# EAGLE board CT_schematic (EAGLE 7.6.0)

Size 100 x 80 mm. Coordinates in mm from the lower left corner, seen from the top.
Outline: 0,0 100,0 100,80 0,80 0,0
Copper layers (1*16): Top 0.035mm / dielectric 1.5mm / Bottom 0.035mm
Design rules "default": minimum track width 10mil, minimum drill 24mil, track to track 8mil, track to pad 8mil, pad to pad 8mil, via to via 8mil, smd to smd 8mil, copper to edge 40mil, drill to drill 8mil, minimum pad ring 10mil, minimum via ring 8mil, stop-mask expansion 4mil, vias tented up to drill 0mil, thermal gap 10mil

## Footprints (pad centres in the part's own frame; a part is rotated, then mirrored left to right if it is on the bottom)
C0603 = smd 0.8 x 0.8: 1 -0.762,0; 2 0.762,0
C0402 = smd 0.5 x 0.5: 1 -0.508,0; 2 0.508,0
C0805 = smd 1.2 x 1.3: 1 -1.016,0; 2 1.016,0
2220 = smd 1.85 x 5.5: 1 -2.55,0; 2 2.55,0
C1210 = smd 1.2 x 2.5: 1 -1.524,0; 2 1.524,0
EXV-9H = smd 3.505 x 1.676: 1 -2.857,0; 2 2.857,0
L0603 = smd 0.8 x 0.8: 1 -0.762,0; 2 0.762,0
DR1040 = smd 1.6 x 3.2: 1 -4.458,0; 2 4.458,0
PJ-037B_PACKAGE = drill 3.7 square: 1 12,0 | drill 3.2 square: 2 6,0
R0603 = smd 0.8 x 0.8: 1 -0.762,0; 2 0.762,0
LQFP208 = smd 0.3 x 1.2: 1 -12.75,-14.4; 2 -12.25,-14.4; 3 -11.75,-14.4; 4 -11.25,-14.4; 5 -10.75,-14.4; 6 -10.25,-14.4; 7 -9.75,-14.4; 8 -9.25,-14.4; 9 -8.75,-14.4; 10 -8.25,-14.4; 11 -7.75,-14.4; 12 -7.25,-14.4; 13 -6.75,-14.4; 14 -6.25,-14.4; 15 -5.75,-14.4; 16 -5.25,-14.4; 17 -4.75,-14.4; 18 -4.25,-14.4; 19 -3.75,-14.4; 20 -3.25,-14.4; 21 -2.75,-14.4; 22 -2.25,-14.4; 23 -1.75,-14.4; 24 -1.25,-14.4; 25 -0.75,-14.4; 26 -0.25,-14.4; 27 0.25,-14.4; 28 0.75,-14.4; 29 1.25,-14.4; 30 1.75,-14.4; 31 2.25,-14.4; 32 2.75,-14.4; 33 3.25,-14.4; 34 3.75,-14.4; 35 4.25,-14.4; 36 4.75,-14.4; 37 5.25,-14.4; 38 5.75,-14.4; 39 6.25,-14.4; 40 6.75,-14.4; 41 7.25,-14.4; 42 7.75,-14.4; 43 8.25,-14.4; 44 8.75,-14.4; 45 9.25,-14.4; 46 9.75,-14.4; 47 10.25,-14.4; 48 10.75,-14.4; 49 11.25,-14.4; 50 11.75,-14.4; 51 12.25,-14.4; 52 12.75,-14.4; 105 12.75,14.4; 106 12.25,14.4; 107 11.75,14.4; 108 11.25,14.4; 109 10.75,14.4; 110 10.25,14.4; 111 9.75,14.4; 112 9.25,14.4; 113 8.75,14.4; 114 8.25,14.4; 115 7.75,14.4; 116 7.25,14.4; 117 6.75,14.4; 118 6.25,14.4; 119 5.75,14.4; 120 5.25,14.4; 121 4.75,14.4; 122 4.25,14.4; 123 3.75,14.4; 124 3.25,14.4; 125 2.75,14.4; 126 2.25,14.4; 127 1.75,14.4; 128 1.25,14.4; 129 0.75,14.4; 130 0.25,14.4; 131 -0.25,14.4; 132 -0.75,14.4; 133 -1.25,14.4; 134 -1.75,14.4; 135 -2.25,14.4; 136 -2.75,14.4; 137 -3.25,14.4; 138 -3.75,14.4; 139 -4.25,14.4; 140 -4.75,14.4; 141 -5.25,14.4; 142 -5.75,14.4; 143 -6.25,14.4; 144 -6.75,14.4; 145 -7.25,14.4; 146 -7.75,14.4; 147 -8.25,14.4; 148 -8.75,14.4; 149 -9.25,14.4; 150 -9.75,14.4; 151 -10.25,14.4; 152 -10.75,14.4; 153 -11.25,14.4; 154 -11.75,14.4; 155 -12.25,14.4; 156 -12.75,14.4 | smd 1.2 x 0.3: 53 14.4,-12.75; 54 14.4,-12.25; 55 14.4,-11.75; 56 14.4,-11.25; 57 14.4,-10.75; 58 14.4,-10.25; 59 14.4,-9.75; 60 14.4,-9.25; 61 14.4,-8.75; 62 14.4,-8.25; 63 14.4,-7.75; 64 14.4,-7.25; 65 14.4,-6.75; 66 14.4,-6.25; 67 14.4,-5.75; 68 14.4,-5.25; 69 14.4,-4.75; 70 14.4,-4.25; 71 14.4,-3.75; 72 14.4,-3.25; 73 14.4,-2.75; 74 14.4,-2.25; 75 14.4,-1.75; 76 14.4,-1.25; 77 14.4,-0.75; 78 14.4,-0.25; 79 14.4,0.25; 80 14.4,0.75; 81 14.4,1.25; 82 14.4,1.75; 83 14.4,2.25; 84 14.4,2.75; 85 14.4,3.25; 86 14.4,3.75; 87 14.4,4.25; 88 14.4,4.75; 89 14.4,5.25; 90 14.4,5.75; 91 14.4,6.25; 92 14.4,6.75; 93 14.4,7.25; 94 14.4,7.75; 95 14.4,8.25; 96 14.4,8.75; 97 14.4,9.25; 98 14.4,9.75; 99 14.4,10.25; 100 14.4,10.75; 101 14.4,11.25; 102 14.4,11.75; 103 14.4,12.25; 104 14.4,12.75; 157 -14.4,12.75; 158 -14.4,12.25; 159 -14.4,11.75; 160 -14.4,11.25; 161 -14.4,10.75; 162 -14.4,10.25; 163 -14.4,9.75; 164 -14.4,9.25; 165 -14.4,8.75; 166 -14.4,8.25; 167 -14.4,7.75; 168 -14.4,7.25; 169 -14.4,6.75; 170 -14.4,6.25; 171 -14.4,5.75; 172 -14.4,5.25; 173 -14.4,4.75; 174 -14.4,4.25; 175 -14.4,3.75; 176 -14.4,3.25; 177 -14.4,2.75; 178 -14.4,2.25; 179 -14.4,1.75; 180 -14.4,1.25; 181 -14.4,0.75; 182 -14.4,0.25; 183 -14.4,-0.25; 184 -14.4,-0.75; 185 -14.4,-1.25; 186 -14.4,-1.75; 187 -14.4,-2.25; 188 -14.4,-2.75; 189 -14.4,-3.25; 190 -14.4,-3.75; 191 -14.4,-4.25; 192 -14.4,-4.75; 193 -14.4,-5.25; 194 -14.4,-5.75; 195 -14.4,-6.25; 196 -14.4,-6.75; 197 -14.4,-7.25; 198 -14.4,-7.75; 199 -14.4,-8.25; 200 -14.4,-8.75; 201 -14.4,-9.25; 202 -14.4,-9.75; 203 -14.4,-10.25; 204 -14.4,-10.75; 205 -14.4,-11.25; 206 -14.4,-11.75; 207 -14.4,-12.25; 208 -14.4,-12.75
LBGA-64 = smd 0.559 x 0.559: A1 -3.5,3.5; A2 -2.5,3.5; A3 -1.5,3.5; A4 -0.5,3.5; A5 0.5,3.5; A6 1.5,3.5; A7 2.5,3.5; A8 3.5,3.5; B1 -3.5,2.5; B2 -2.5,2.5; B3 -1.5,2.5; B4 -0.5,2.5; B5 0.5,2.5; B6 1.5,2.5; B7 2.5,2.5; B8 3.5,2.5; C1 -3.5,1.5; C2 -2.5,1.5; C3 -1.5,1.5; C4 -0.5,1.5; C5 0.5,1.5; C6 1.5,1.5; C7 2.5,1.5; C8 3.5,1.5; D1 -3.5,0.5; D2 -2.5,0.5; D3 -1.5,0.5; D4 -0.5,0.5; D5 0.5,0.5; D6 1.5,0.5; D7 2.5,0.5; D8 3.5,0.5; E1 -3.5,-0.5; E2 -2.5,-0.5; E3 -1.5,-0.5; E4 -0.5,-0.5; E5 0.5,-0.5; E6 1.5,-0.5; E7 2.5,-0.5; E8 3.5,-0.5; F1 -3.5,-1.5; F2 -2.5,-1.5; F3 -1.5,-1.5; F4 -0.5,-1.5; F5 0.5,-1.5; F6 1.5,-1.5; F7 2.5,-1.5; F8 3.5,-1.5; G1 -3.5,-2.5; G2 -2.5,-2.5; G3 -1.5,-2.5; G4 -0.5,-2.5; G5 0.5,-2.5; G6 1.5,-2.5; G7 2.5,-2.5; G8 3.5,-2.5; H1 -3.5,-3.5; H2 -2.5,-3.5; H3 -1.5,-3.5; H4 -0.5,-3.5; H5 0.5,-3.5; H6 1.5,-3.5; H7 2.5,-3.5; H8 3.5,-3.5
TFBGA-153 = smd 0.3 x 0.3: A1 -3.25,3.25; A2 -2.75,3.25; A3 -2.25,3.25; A4 -1.75,3.25; A5 -1.25,3.25; A6 -0.75,3.25; A7 -0.25,3.25; A8 0.25,3.25; A9 0.75,3.25; A10 1.25,3.25; A11 1.75,3.25; A12 2.25,3.25; A13 2.75,3.25; A14 3.25,3.25; B1 -3.25,2.75; B2 -2.75,2.75; B3 -2.25,2.75; B4 -1.75,2.75; B5 -1.25,2.75; B6 -0.75,2.75; B7 -0.25,2.75; B8 0.25,2.75; B9 0.75,2.75; B10 1.25,2.75; B11 1.75,2.75; B12 2.25,2.75; B13 2.75,2.75; B14 3.25,2.75; C1 -3.25,2.25; C2 -2.75,2.25; C3 -2.25,2.25; C4 -1.75,2.25; C5 -1.25,2.25; C6 -0.75,2.25; C7 -0.25,2.25; C8 0.25,2.25; C9 0.75,2.25; C10 1.25,2.25; C11 1.75,2.25; C12 2.25,2.25; C13 2.75,2.25; C14 3.25,2.25; D1 -3.25,1.75; D2 -2.75,1.75; D3 -2.25,1.75; D4 -1.75,1.75; D12 2.25,1.75; D13 2.75,1.75; D14 3.25,1.75; E1 -3.25,1.25; E2 -2.75,1.25; E3 -2.25,1.25; E5 -1.25,1.25; E6 -0.75,1.25; E7 -0.25,1.25; E8 0.25,1.25; E9 0.75,1.25; E10 1.25,1.25; E12 2.25,1.25; E13 2.75,1.25; E14 3.25,1.25; F1 -3.25,0.75; F2 -2.75,0.75; F3 -2.25,0.75; F5 -1.25,0.75; F10 1.25,0.75; F12 2.25,0.75; F13 2.75,0.75; F14 3.25,0.75; G1 -3.25,0.25; G2 -2.75,0.25; G3 -2.25,0.25; G5 -1.25,0.25; G10 1.25,0.25; G12 2.25,0.25; G13 2.75,0.25; G14 3.25,0.25; H1 -3.25,-0.25; H2 -2.75,-0.25; H3 -2.25,-0.25; H5 -1.25,-0.25; H10 1.25,-0.25; H12 2.25,-0.25; H13 2.75,-0.25; H14 3.25,-0.25; J1 -3.25,-0.75; J2 -2.75,-0.75; J3 -2.25,-0.75; J5 -1.25,-0.75; J10 1.25,-0.75; J12 2.25,-0.75; J13 2.75,-0.75; J14 3.25,-0.75; K1 -3.25,-1.25; K2 -2.75,-1.25; K3 -2.25,-1.25; K5 -1.25,-1.25; K6 -0.75,-1.25; K7 -0.25,-1.25; K8 0.25,-1.25; K9 0.75,-1.25; K10 1.25,-1.25; K12 2.25,-1.25; K13 2.75,-1.25; K14 3.25,-1.25; L1 -3.25,-1.75; L2 -2.75,-1.75; L3 -2.25,-1.75; L12 2.25,-1.75; L13 2.75,-1.75; L14 3.25,-1.75; M1 -3.25,-2.25; M2 -2.75,-2.25; M3 -2.25,-2.25; M4 -1.75,-2.25; M5 -1.25,-2.25; M6 -0.75,-2.25; M7 -0.25,-2.25; M8 0.25,-2.25; M9 0.75,-2.25; M10 1.25,-2.25; M11 1.75,-2.25; M12 2.25,-2.25; M13 2.75,-2.25; M14 3.25,-2.25; N1 -3.25,-2.75; N2 -2.75,-2.75; N3 -2.25,-2.75; N4 -1.75,-2.75; N5 -1.25,-2.75; N6 -0.75,-2.75; N7 -0.25,-2.75; N8 0.25,-2.75; N9 0.75,-2.75; N10 1.25,-2.75; N11 1.75,-2.75; N12 2.25,-2.75; N13 2.75,-2.75; N14 3.25,-2.75; P1 -3.25,-3.25; P2 -2.75,-3.25; P3 -2.25,-3.25; P4 -1.75,-3.25; P5 -1.25,-3.25; P6 -0.75,-3.25; P7 -0.25,-3.25; P8 0.25,-3.25; P9 0.75,-3.25; P10 1.25,-3.25; P11 1.75,-3.25; P12 2.25,-3.25; P13 2.75,-3.25; P14 3.25,-3.25
QFN-32 = smd 0.6 x 0.3: 1 -2.3,1.75; 2 -2.3,1.25; 3 -2.3,0.75; 4 -2.3,0.25; 5 -2.3,-0.25; 6 -2.3,-0.75; 7 -2.3,-1.25; 8 -2.3,-1.75; 17 2.3,-1.75; 18 2.3,-1.25; 19 2.3,-0.75; 20 2.3,-0.25; 21 2.3,0.25; 22 2.3,0.75; 23 2.3,1.25; 24 2.3,1.75 | smd 0.3 x 0.6: 9 -1.75,-2.3; 10 -1.25,-2.3; 11 -0.75,-2.3; 12 -0.25,-2.3; 13 0.25,-2.3; 14 0.75,-2.3; 15 1.25,-2.3; 16 1.75,-2.3; 25 1.75,2.3; 26 1.25,2.3; 27 0.75,2.3; 28 0.25,2.3; 29 -0.25,2.3; 30 -0.75,2.3; 31 -1.25,2.3; 32 -1.75,2.3 | smd 3.2 x 3.2: EXP 0,0
SJ-43515TS-SMT-TR = smd 2.2 x 3: 1 0.6,-7.4; 4 3.4,-7.4 | smd 3 x 3: 2 12.8,-7.4; 5 17,-3 | smd 2 x 3: 3 5.3,0; 6 2.5,0 | drill 1.8: P$7 4.5,-3.69; P$8 11.54,-3.69
WM-64PC = drill 0.6 pad 1: 1 -1,0.95; 2 -1,-0.95
RHB32_3P45X3P45 = smd 0.85 x 0.28: 1 -2.475,1.75; 2 -2.475,1.25; 3 -2.475,0.75; 4 -2.475,0.25; 5 -2.475,-0.25; 6 -2.475,-0.75; 7 -2.475,-1.25; 8 -2.475,-1.75; 17 2.475,-1.75; 18 2.475,-1.25; 19 2.475,-0.75; 20 2.475,-0.25; 21 2.475,0.25; 22 2.475,0.75; 23 2.475,1.25; 24 2.475,1.75 | smd 0.28 x 0.85: 9 -1.75,-2.475; 10 -1.25,-2.475; 11 -0.75,-2.475; 12 -0.25,-2.475; 13 0.25,-2.475; 14 0.75,-2.475; 15 1.25,-2.475; 16 1.75,-2.475; 25 1.75,2.475; 26 1.25,2.475; 27 0.75,2.475; 28 0.25,2.475; 29 -0.25,2.475; 30 -0.75,2.475; 31 -1.25,2.475; 32 -1.75,2.475 | smd 3.45 x 3.45: 33 0,0
FCI_10118193-0001LF = smd 0.4 x 1.35: 1 -1.3,2.675; 2 -0.65,2.675; 3 0,2.675; 4 0.65,2.675; 5 1.3,2.675 | smd 1.6 x 1.4: 6 -3.2,2.45; 7 3.2,2.45 | smd 1.9 x 1.9: 8 -1.2,0; 9 1.2,0 | hole 0.5: -3.3,0; 3.3,0
SOT143B = smd 1 x 0.7: 1 -0.75,-1 | smd 0.6 x 0.7: 2 0.95,-1; 3 0.95,1; 4 -0.95,1
ASEK = smd 1.4 x 1: 1 -1.1,-0.8; 2 1.1,-0.8; 3 1.1,0.8; 4 -1.1,0.8
ASFL1 = smd 1.7 x 1.5: 1 -1.27,-1.1; 2 1.27,-1.1; 3 1.27,1.1; 4 -1.27,1.1
QFN-16_EP = smd 0.805 x 0.3: 1 -1.452,0.75; 2 -1.452,0.25; 3 -1.452,-0.25; 4 -1.452,-0.75; 9 1.452,-0.75; 10 1.452,-0.25; 11 1.452,0.25; 12 1.452,0.75 | smd 0.3 x 0.805: 5 -0.75,-1.452; 6 -0.25,-1.452; 7 0.25,-1.452; 8 0.75,-1.452; 13 0.75,1.452; 14 0.25,1.452; 15 -0.25,1.452; 16 -0.75,1.452 | smd 1.55 x 1.55: 17 0,0
WSON-8 = smd 0.3 x 0.6: 1 -0.75,0; 2 0.05,0; 3 0.85,0; 4 1.65,0; 5 1.65,3.8; 6 0.85,3.8; 7 0.05,3.8; 8 -0.75,3.8 | smd 3 x 2.6: PAD 0.45,1.9
SON-6 = smd 0.55 x 0.3: 1 -0.355,0.5 | smd 0.52 x 0.3: 2 -0.37,0; 3 -0.37,-0.5; 4 0.37,-0.5; 5 0.37,0; 6 0.37,0.5
SW_4-1437565-2 = smd 1.4 x 2.1: 1 -2.23,4.55; 2 -2.23,-4.55; 3 2.23,4.55; 4 2.23,-4.55
LGM67K-G1J2-24-Z = smd 0.8 x 1.4: A -2,0; C 0,0
NC7SZ125M5X = smd 1.3 x 0.7: 1 -1.3,0.95; 2 -1.3,0; 3 -1.3,-0.95; 4 1.3,-0.95; 5 1.3,0.95

## Placement (x,y rotation side)
C1  1e-06  [C0603]  -49.53,88.9 0 top  (outside the outline)
C2  1e-07  [C0603]  -53.34,88.9 0 top  (outside the outline)
C3  1e-07  [C0603]  -57.15,88.9 0 top  (outside the outline)
C4  1e-07  [C0603]  -60.96,88.9 0 top  (outside the outline)
C5  1e-07  [C0603]  -64.77,88.9 0 top  (outside the outline)
C6  1e-07  [C0603]  -68.58,88.9 0 top  (outside the outline)
C7  1e-07  [C0603]  -72.39,88.9 0 top  (outside the outline)
C8  1e-07  [C0603]  -76.2,88.9 0 top  (outside the outline)
C9  1e-07  [C0603]  -80.01,88.9 0 top  (outside the outline)
C10  1e-07  [C0603]  -83.82,88.9 0 top  (outside the outline)
C11  1e-07  [C0603]  -87.63,88.9 0 top  (outside the outline)
C12  1e-07  [C0603]  -91.44,88.9 0 top  (outside the outline)
C13  1e-07  [C0603]  -15.24,93.98 0 top  (outside the outline)
C14  1e-07  [C0603]  -19.05,93.98 0 top  (outside the outline)
C15  1e-07  [C0603]  -22.86,93.98 0 top  (outside the outline)
C16  1e-07  [C0603]  -26.67,93.98 0 top  (outside the outline)
C17  1e-07  [C0603]  -30.48,93.98 0 top  (outside the outline)
C18  1e-07  [C0603]  -34.29,93.98 0 top  (outside the outline)
C19  1e-07  [C0603]  -38.1,93.98 0 top  (outside the outline)
C20  4.7e-06  [C0603]  -19.05,88.9 0 top  (outside the outline)
C21  1e-07  [C0603]  -41.91,93.98 0 top  (outside the outline)
C22  2.2e-06  [C0603]  -22.86,88.9 0 top  (outside the outline)
C23  2.2e-06  [C0603]  -26.67,88.9 0 top  (outside the outline)
C24  1e-08  [C0603]  -45.72,93.98 0 top  (outside the outline)
C25  1e-06  [C0603]  -49.53,93.98 0 top  (outside the outline)
C26  1e-07  [C0603]  -53.34,93.98 0 top  (outside the outline)
C27  1e-08  [C0402]  -57.15,99.06 0 top  (outside the outline)
C28  1e-08  [C0402]  -60.96,99.06 0 top  (outside the outline)
C29  1e-07  [C0402]  -64.77,99.06 0 top  (outside the outline)
C30  2.2e-06  [C0603]  -30.48,88.9 0 top  (outside the outline)
C31  2.2e-06  [C0603]  -34.29,88.9 0 top  (outside the outline)
C32  1e-07  [C0402]  -68.58,99.06 0 top  (outside the outline)
C33  1e-07  [C0402]  -72.39,99.06 0 top  (outside the outline)
C34  2.2e-06  [C0603]  -38.1,88.9 0 top  (outside the outline)
C35  1e-06  [C0603]  -57.15,93.98 0 top  (outside the outline)
C36  1e-06  [C0603]  -60.96,93.98 0 top  (outside the outline)
C37  1e-06  [C0603]  -64.77,93.98 0 top  (outside the outline)
C38  1e-06  [C0603]  -68.58,93.98 0 top  (outside the outline)
C39  1e-06  [C0603]  -72.39,93.98 0 top  (outside the outline)
C40  1e-06  [C0603]  -76.2,93.98 0 top  (outside the outline)
C41  1e-06  [C0603]  -80.01,93.98 0 top  (outside the outline)
C42  1e-07  [C0402]  -76.2,99.06 0 top  (outside the outline)
C43  1e-07  [C0402]  -80.01,99.06 0 top  (outside the outline)
C44  1e-07  [C0402]  -83.82,99.06 0 top  (outside the outline)
C45  1e-07  [C0402]  -87.63,99.06 0 top  (outside the outline)
C46  1e-06  [C0603]  -83.82,93.98 0 top  (outside the outline)
C47  1e-07  [C0402]  -91.44,99.06 0 top  (outside the outline)
C48  2.2e-06  [C0603]  -41.91,88.9 0 top  (outside the outline)
C49  1e-07  [C0402]  -95.25,99.06 0 top  (outside the outline)
C50  1e-07  [C0402]  -15.24,104.14 0 top  (outside the outline)
C51  2.2e-06  [C0603]  -45.72,88.9 0 top  (outside the outline)
C52  1e-06  [C0603]  -87.63,93.98 0 top  (outside the outline)
C53  1e-08  [C0402]  -19.05,104.14 0 top  (outside the outline)
C54  1e-08  [C0402]  -22.86,104.14 0 top  (outside the outline)
C55  1e-08  [C0402]  -26.67,104.14 0 top  (outside the outline)
C56  1e-08  [C0402]  -30.48,104.14 0 top  (outside the outline)
C57  1e-05  [C0805]  -27.94,77.47 0 top  (outside the outline)
C58  1e-06  [C0603]  -91.44,93.98 0 top  (outside the outline)
C59  1e-07  [C0402]  -34.29,104.14 0 top  (outside the outline)
C60  6.8e-05  [2220]  -90.17,49.53 0 top  (outside the outline)
C61  1e-06  [C0603]  -15.24,99.06 0 top  (outside the outline)
C62  1e-05  [C1210]  -80.01,71.12 0 top  (outside the outline)
C63  1e-07  [C0402]  -38.1,104.14 0 top  (outside the outline)
C64  0.0001  [EXV-9H]  -38.1,71.12 0 top  (outside the outline)
C65  0.0001  [EXV-9H]  -49.53,71.12 0 top  (outside the outline)
C66  1e-08  [C0402]  -41.91,104.14 0 top  (outside the outline)
C67  1e-08  [C0402]  -45.72,104.14 0 top  (outside the outline)
C68  1e-08  [C0402]  -49.53,104.14 0 top  (outside the outline)
C69  1e-08  [C0402]  -53.34,104.14 0 top  (outside the outline)
F1  240.0  [L0603]  -19.05,99.06 0 top  (outside the outline)
I1  3.8e-06  [DR1040]  -54.61,49.53 0 top  (outside the outline)
J1  PJ-037B  [PJ-037B_PACKAGE]  -27.94,50.8 0 top  (outside the outline)
R2  1000.0  [R0603]  -22.86,99.06 0 top  (outside the outline)
R4  4700.0  [R0603]  -26.67,99.06 0 top  (outside the outline)
R5  4700.0  [R0603]  -30.48,99.06 0 top  (outside the outline)
R6  4700.0  [R0603]  -34.29,99.06 0 top  (outside the outline)
R7  4700.0  [R0603]  -38.1,99.06 0 top  (outside the outline)
R8  10000.0  [R0603]  -63.5,77.47 0 top  (outside the outline)
R9  10000.0  [R0603]  -68.58,77.47 0 top  (outside the outline)
R10  10000.0  [R0603]  -73.66,77.47 0 top  (outside the outline)
R11  10000.0  [R0603]  -78.74,77.47 0 top  (outside the outline)
R12  10000.0  [R0603]  -83.82,77.47 0 top  (outside the outline)
R13  10000.0  [R0603]  -88.9,77.47 0 top  (outside the outline)
R14  10000.0  [R0603]  -93.98,77.47 0 top  (outside the outline)
R15  34000.0  [R0603]  -15.24,83.82 0 top  (outside the outline)
R16  34000.0  [R0603]  -20.32,83.82 0 top  (outside the outline)
R17  34000.0  [R0603]  -25.4,83.82 0 top  (outside the outline)
R18  34000.0  [R0603]  -30.48,83.82 0 top  (outside the outline)
R19  34000.0  [R0603]  -35.56,83.82 0 top  (outside the outline)
R20  34000.0  [R0603]  -40.64,83.82 0 top  (outside the outline)
R21  34000.0  [R0603]  -45.72,83.82 0 top  (outside the outline)
R22  34000.0  [R0603]  -50.8,83.82 0 top  (outside the outline)
R23  34000.0  [R0603]  -55.88,83.82 0 top  (outside the outline)
R24  34000.0  [R0603]  -60.96,83.82 0 top  (outside the outline)
R25  1270.0  [R0603]  -41.91,99.06 0 top  (outside the outline)
R26  1270.0  [R0603]  -45.72,99.06 0 top  (outside the outline)
R27  10000.0  [R0603]  -66.04,83.82 0 top  (outside the outline)
R28  10000.0  [R0603]  -71.12,83.82 0 top  (outside the outline)
R29  20000.0  [R0603]  -76.2,83.82 0 top  (outside the outline)
R30  39000.0  [R0603]  -81.28,83.82 0 top  (outside the outline)
R31  300000.0  [R0603]  -38.1,77.47 0 top  (outside the outline)
R32  100000.0  [R0603]  -43.18,77.47 0 top  (outside the outline)
R33  153694.38  [R0603]  -33.02,77.47 0 top  (outside the outline)
R34  100000.0  [R0603]  -48.26,77.47 0 top  (outside the outline)
R35  10000.0  [R0603]  -86.36,83.82 0 top  (outside the outline)
R36  10000.0  [R0603]  -91.44,83.82 0 top  (outside the outline)
R37  82000.0  [R0603]  -15.24,88.9 0 top  (outside the outline)
R38  300000.0  [R0603]  -53.34,77.47 0 top  (outside the outline)
R39  120000.0  [R0603]  -58.42,77.47 0 top  (outside the outline)
U1  STM32F769BIT6  [LQFP208]  -27.94,15.24 0 top  (outside the outline)
U2  mt28ew256aba1HPC-0SIT  [LBGA-64]  -63.5,7.62 0 top  (outside the outline)
U3  mtfc4gmcdm  [TFBGA-153]  -50.8,8.89 0 top  (outside the outline)
U4  SGTL5000XNAA3  [QFN-32]  -81.28,49.53 0 top  (outside the outline)
U5  SJ-43515TS-SMT-TR  [SJ-43515TS-SMT-TR]  -39.37,39.37 0 top  (outside the outline)
U6  SJ-43515TS-SMT-TR  [SJ-43515TS-SMT-TR]  -67.31,39.37 0 top  (outside the outline)
U7  SJ-43515TS-SMT-TR  [SJ-43515TS-SMT-TR]  -95.25,39.37 0 top  (outside the outline)
U8  WM-64PCT  [WM-64PC]  -67.31,49.53 0 top  (outside the outline)
U9  TUSB1210BRHBR  [RHB32_3P45X3P45]  -59.69,71.12 0 top  (outside the outline)
U10  10118193-0001LF  [FCI_10118193-0001LF]  -88.9,60.96 0 top  (outside the outline)
U11  prtr5v0u2ax  [SOT143B]  -66.04,104.14 0 top  (outside the outline)
U12  ASEK-32.768KHz-ECST  [ASEK]  -29.21,71.12 0 top  (outside the outline)
U13  ASFL-24.57MHZ-NCS  [ASFL1]  -46.99,62.23 0 top  (outside the outline)
U14  ASFL1-25MHZ-NCS  [ASFL1]  -63.5,62.23 0 top  (outside the outline)
U15  ASFL1-26MHZ-NCS  [ASFL1]  -80.01,62.23 0 top  (outside the outline)
U16  LTC3601EUD#PBF  [QFN-16_EP]  -50.8,99.06 0 top  (outside the outline)
U17  LP2951ACSDX/NOPB  [WSON-8]  -29.21,60.96 0 top  (outside the outline)
U18  TPS3895ADRYR  [SON-6]  -69.85,102.87 0 top  (outside the outline)
U19  4-1437565-2  [SW_4-1437565-2]  -44.45,50.8 0 top  (outside the outline)
U20  Q65110A2395  [LGM67K-G1J2-24-Z]  -68.58,71.12 0 top  (outside the outline)
U21  nc7sz125m5x  [NC7SZ125M5X]  -85.09,69.85 0 top  (outside the outline)
U22  nc7sz125m5x  [NC7SZ125M5X]  -91.44,69.85 0 top  (outside the outline)
U23  nc7sz125m5x  [NC7SZ125M5X]  -15.24,77.47 0 top  (outside the outline)
U24  nc7sz125m5x  [NC7SZ125M5X]  -21.59,77.47 0 top  (outside the outline)

## Library data of the parts
C1-C69 F1 I1 J1 R2 R4-R39 U1-U24 = circuit_tree

## Nets
CLK_U1_9: U1.9 U12.3
CLK_U1_32: U1.32 U14.3
CLK_U4_21: U4.21 U13.3
CLK_U9_1: U9.1 U15.3
GND: C1.2 C2.2 C3.2 C4.2 C5.2 C6.2 C7.2 C8.2 C9.2 C10.2 C11.2 C12.2 C13.2 C14.2 C15.2 C16.2 C17.2 C18.2 C19.2 C20.2 C21.2 C22.2 C23.2 C24.2 C25.2 C26.2 C27.2 C28.2 C29.2 C30.2 C31.2 C32.2 C33.2 C34.2 C42.2 C43.2 C44.2 C45.2 C46.2 C47.2 C48.2 C49.2 C50.2 C51.2 C52.2 C53.2 C54.2 C55.2 C56.2 C57.2 C58.2 C60.1 C60.2 C61.2 C62.2 C63.2 C64.2 C65.2 C66.2 C67.2 C68.2 C69.2 J1.2 R2.2 R8.2 R26.2 R29.2 R31.2 R34.2 R37.2 R39.2 U1.14 U1.25 U1.40 U1.51 U1.60 U1.72 U1.82 U1.93 U1.114 U1.122 U1.128 U1.136 U1.149 U1.170 U1.184 U1.202 U2.E8 U2.H2 U2.H7 U3.C4 U3.E7 U3.G5 U3.H10 U3.K8 U3.N2 U3.N5 U3.P4 U3.P6 U4.1 U4.3 U4.7 U4.EXP U6.1 U7.1 U8.2 U9.33 U10.5 U10.6 U10.7 U10.8 U10.9 U11.1 U12.2 U13.2 U14.2 U15.2 U16.1 U16.9 U16.17 U17.3 U17.4 U17.PAD U18.2 U20.C U21.1 U21.3 U22.1 U22.3 U23.1 U23.3 U24.1 U24.3
NET_U1_34: R6.1 U1.34 U23.4
NET_U1_42: C24.1 C25.1 F1.1 U1.41 U1.42
NET_U1_92: C22.1 U1.92
NET_U1_119: U1.119
NET_U1_125: U1.125
NET_U1_148: C23.1 U1.148
NET_U1_197: R8.1 U1.197
NET_U1_203: R9.1 U1.203
NET_U1_207: U20.A
NET_U1_208: U19.3 U19.4
NET_U2_B4: R13.1 U2.B4
NET_U2_B5: R4.1 U2.B5 U21.4
NET_U3_C2: C31.1 C32.1 U3.C2
NET_U3_K5: R5.1 U3.K5 U22.4
NET_U4_10: C45.1 U4.10
NET_U4_29: R25.1 U4.29
NET_U4_31: R26.1 U4.31
NET_U5_1: U4.4 U5.1
NET_U5_2: U4.2 U5.2
NET_U5_5: U4.6 U5.5
NET_U6_2: C36.1 U6.2
NET_U6_5: C35.1 U6.5
NET_U6_11: C36.2
NET_U6_12: C35.2
NET_U7_2: C38.1 C39.1 U7.2
NET_U7_5: C37.1 U7.5
NET_U7_13: C38.2 C39.2
NET_U7_14: C37.2
NET_U8_1: C40.1 C41.1 C46.1 U4.16 U8.1
NET_U8_15: C40.2 C41.2
NET_U9_11: R27.1 U9.11
NET_U9_12: C51.1 U9.12
NET_U9_14: R28.1 U9.14
NET_U9_20: C48.1 U9.20
NET_U9_27: R7.1 U9.27 U24.4
NET_U10_1: C52.1 U9.22 U10.1 U11.4
NET_U10_2: U9.19 U10.2 U11.3
NET_U10_3: U9.18 U10.3 U11.2
NET_U16_3: C59.2 I1.1 U16.3 U16.4
NET_U16_6: C59.1 U16.6
NET_U16_7: C58.1 U16.7 U16.12
NET_U16_10: R31.1 U16.10
NET_U16_11: R29.1 R30.1 U16.11
NET_U16_14: U16.14
NET_U16_ATNET_3: I1.2 R30.2
NET_U17_5: R32.1 U17.5
NET_U17_7: R33.2 R34.1 U17.7
NET_U18_1: R36.1 R37.1 U18.1
NET_U18_3: R38.2 R39.1 U18.3
NET_U18_4: R35.1 U18.4 U21.2 U22.2 U23.2 U24.2
NET_U19_1: R2.1 U19.1 U19.2
PROC_FMC_A0: U1.16 U2.E2
PROC_FMC_A1: U1.17 U2.D2
PROC_FMC_A2: U1.18 U2.C2
PROC_FMC_A3: U1.22 U2.A2
PROC_FMC_A4: U1.23 U2.B2
PROC_FMC_A5: U1.24 U2.D3
PROC_FMC_A6: U1.71 U2.C3
PROC_FMC_A7: U1.74 U2.A3
PROC_FMC_A8: U1.75 U2.B6
PROC_FMC_A9: U1.76 U2.A6
PROC_FMC_A10: U1.77 U2.C6
PROC_FMC_A11: U1.78 U2.D6
PROC_FMC_A12: U1.129 U2.B7
PROC_FMC_A13: U1.130 U2.A7
PROC_FMC_A14: U1.131 U2.C7
PROC_FMC_A15: U1.132 U2.D7
PROC_FMC_A16: U1.111 U2.E7
PROC_FMC_A17: U1.112 U2.B3
PROC_FMC_A18: U1.113 U2.C4
PROC_FMC_A19: U1.2 U2.D5
PROC_FMC_A20: U1.3 U2.D4
PROC_FMC_A21: U1.4 U2.C5
PROC_FMC_A22: U1.5 U2.B8
PROC_FMC_A23: U1.1 U2.C8
PROC_FMC_D0: U1.116 U2.E3
PROC_FMC_D1: U1.117 U2.H3
PROC_FMC_D2: U1.164 U2.E4
PROC_FMC_D3: U1.165 U2.H4
PROC_FMC_D4: U1.79 U2.H5
PROC_FMC_D5: U1.80 U2.E5
PROC_FMC_D6: U1.81 U2.H6
PROC_FMC_D7: U1.84 U2.E6
PROC_FMC_D8: U1.85 U2.F3
PROC_FMC_D9: U1.86 U2.G3
PROC_FMC_D10: U1.87 U2.F4
PROC_FMC_D11: U1.88 U2.G4
PROC_FMC_D12: U1.89 U2.F5
PROC_FMC_D13: U1.108 U2.G6
PROC_FMC_D14: U1.109 U2.F6
PROC_FMC_D15: U1.110 U2.G7
PROC_FMC_NBL0: R14.1 U1.200 U2.F7
PROC_FMC_NE2: R10.1 U1.178 U2.F2
PROC_FMC_NOE: R11.1 U1.168 U2.G2
PROC_FMC_NWAIT: U1.172 U2.A4
PROC_FMC_NWE: R12.1 U1.169 U2.A5
PROC_I2S1_CK: U1.180 U4.24
PROC_I2S1_SD: U1.56 U4.26
PROC_I2S1_WS: U1.53 U4.23
PROC_SDMMC1_CK: R24.1 U1.163 U3.M6
PROC_SDMMC1_CMD: R23.1 U1.166 U3.M5
PROC_SDMMC1_D0: R15.1 U1.140 U3.A3
PROC_SDMMC1_D1: R16.1 U1.141 U3.A4
PROC_SDMMC1_D2: R17.1 U1.161 U3.A5
PROC_SDMMC1_D3: R18.1 U1.162 U3.B2
PROC_SDMMC1_D4: R19.1 U1.198 U3.B3
PROC_SDMMC1_D5: R20.1 U1.199 U3.B4
PROC_SDMMC1_D6: R21.1 U1.138 U3.B5
PROC_SDMMC1_D7: R22.1 U1.139 U3.B6
PROC_USB_OTG_HS_ULPI_CK: U1.54 U9.26
PROC_USB_OTG_HS_ULPI_D0: U1.50 U9.3
PROC_USB_OTG_HS_ULPI_D1: U1.61 U9.4
PROC_USB_OTG_HS_ULPI_D2: U1.62 U9.5
PROC_USB_OTG_HS_ULPI_D3: U1.90 U9.6
PROC_USB_OTG_HS_ULPI_D4: U1.91 U9.7
PROC_USB_OTG_HS_ULPI_D5: U1.104 U9.9
PROC_USB_OTG_HS_ULPI_D6: U1.105 U9.10
PROC_USB_OTG_HS_ULPI_D7: U1.194 U9.13
PROC_USB_OTG_HS_ULPI_DIR: U1.13 U9.31
PROC_USB_OTG_HS_ULPI_NXT: U1.38 U9.2
PROC_USB_OTG_HS_ULPI_STP: U1.35 U9.29
VCC_S1_6V7: C57.1 C61.1 C64.1 C65.1 J1.1 U16.15 U16.16 U17.8
VCC_TIER1_1V8: C1.1 C2.1 C3.1 C4.1 C5.1 C6.1 C7.1 C8.1 C9.1 C10.1 C11.1 C12.1 C13.1 C14.1 C15.1 C16.1 C17.1 C18.1 C19.1 C20.1 C21.1 C27.1 C29.1 C30.1 C42.1 C43.1 C44.1 C49.1 C50.1 C60.2 C63.1 C66.1 C67.1 C68.1 C69.1 F1.2 I1.2 R4.2 R5.2 R6.2 R7.2 R9.2 R10.2 R11.2 R12.2 R13.2 R14.2 R15.2 R16.2 R17.2 R18.2 R19.2 R20.2 R21.2 R22.2 R23.2 R24.2 R25.2 R27.2 R28.2 R30.2 R35.2 R36.2 R38.1 U1.6 U1.15 U1.26 U1.39 U1.52 U1.59 U1.73 U1.83 U1.94 U1.103 U1.115 U1.118 U1.150 U1.158 U1.171 U1.185 U1.204 U2.D8 U2.F1 U3.C6 U3.M4 U3.N4 U3.P3 U3.P5 U4.5 U4.20 U4.30 U9.28 U9.30 U9.32 U16.8 U18.6 U21.5 U22.5 U23.5 U24.5
VCC_TIER1_3V3: C26.1 C28.1 C33.1 C34.1 C47.1 C53.1 C54.1 C55.1 C56.1 C62.1 R32.2 R33.1 U1.137 U2.G5 U3.E6 U3.F5 U3.J10 U3.K9 U9.21 U12.4 U13.4 U14.4 U15.4 U17.1

## Tracks (layer width: path | path; a pad name or v marks a point on that pad's centre or on a via)
CLK_U1_9  (1 unrouted)
CLK_U1_32  (1 unrouted)
CLK_U4_21  (1 unrouted)
CLK_U9_1  (1 unrouted)
GND  (132 unrouted)
NET_U1_34  (2 unrouted)
NET_U1_42  (4 unrouted)
NET_U1_92  (1 unrouted)
NET_U1_148  (1 unrouted)
NET_U1_197  (1 unrouted)
NET_U1_203  (1 unrouted)
NET_U1_208  (1 unrouted)
NET_U2_B4  (1 unrouted)
NET_U2_B5  (2 unrouted)
NET_U3_C2  (2 unrouted)
NET_U3_K5  (2 unrouted)
NET_U4_10  (1 unrouted)
NET_U4_29  (1 unrouted)
NET_U4_31  (1 unrouted)
NET_U5_1  (1 unrouted)
NET_U5_2  (1 unrouted)
NET_U5_5  (1 unrouted)
NET_U6_2  (1 unrouted)
NET_U6_5  (1 unrouted)
NET_U7_2  (2 unrouted)
NET_U7_5  (1 unrouted)
NET_U7_13  (1 unrouted)
NET_U8_1  (4 unrouted)
NET_U8_15  (1 unrouted)
NET_U9_11  (1 unrouted)
NET_U9_12  (1 unrouted)
NET_U9_14  (1 unrouted)
NET_U9_20  (1 unrouted)
NET_U9_27  (2 unrouted)
NET_U10_1  (3 unrouted)
NET_U10_2  (2 unrouted)
NET_U10_3  (2 unrouted)
NET_U16_3  (3 unrouted)
NET_U16_6  (1 unrouted)
NET_U16_7  (2 unrouted)
NET_U16_10  (1 unrouted)
NET_U16_11  (2 unrouted)
NET_U16_ATNET_3  (1 unrouted)
NET_U17_5  (1 unrouted)
NET_U17_7  (2 unrouted)
NET_U18_1  (2 unrouted)
NET_U18_3  (2 unrouted)
NET_U18_4  (5 unrouted)
NET_U19_1  (2 unrouted)
PROC_FMC_A0  (1 unrouted)
PROC_FMC_A1  (1 unrouted)
PROC_FMC_A2  (1 unrouted)
PROC_FMC_A3  (1 unrouted)
PROC_FMC_A4  (1 unrouted)
PROC_FMC_A5  (1 unrouted)
PROC_FMC_A6  (1 unrouted)
PROC_FMC_A7  (1 unrouted)
PROC_FMC_A8  (1 unrouted)
PROC_FMC_A9  (1 unrouted)
PROC_FMC_A10  (1 unrouted)
PROC_FMC_A11  (1 unrouted)
PROC_FMC_A12  (1 unrouted)
PROC_FMC_A13  (1 unrouted)
PROC_FMC_A14  (1 unrouted)
PROC_FMC_A15  (1 unrouted)
PROC_FMC_A16  (1 unrouted)
PROC_FMC_A17  (1 unrouted)
PROC_FMC_A18  (1 unrouted)
PROC_FMC_A19  (1 unrouted)
PROC_FMC_A20  (1 unrouted)
PROC_FMC_A21  (1 unrouted)
PROC_FMC_A22  (1 unrouted)
PROC_FMC_A23  (1 unrouted)
PROC_FMC_D0  (1 unrouted)
PROC_FMC_D1  (1 unrouted)
PROC_FMC_D2  (1 unrouted)
PROC_FMC_D3  (1 unrouted)
PROC_FMC_D4  (1 unrouted)
PROC_FMC_D5  (1 unrouted)
PROC_FMC_D6  (1 unrouted)
PROC_FMC_D7  (1 unrouted)
PROC_FMC_D8  (1 unrouted)
PROC_FMC_D9  (1 unrouted)
PROC_FMC_D10  (1 unrouted)
PROC_FMC_D11  (1 unrouted)
PROC_FMC_D12  (1 unrouted)
PROC_FMC_D13  (1 unrouted)
PROC_FMC_D14  (1 unrouted)
PROC_FMC_D15  (1 unrouted)
PROC_FMC_NBL0  (2 unrouted)
PROC_FMC_NE2  (2 unrouted)
PROC_FMC_NOE  (2 unrouted)
PROC_FMC_NWAIT  (1 unrouted)
PROC_FMC_NWE  (2 unrouted)
PROC_I2S1_CK  (1 unrouted)
PROC_I2S1_SD  (1 unrouted)
PROC_I2S1_WS  (1 unrouted)
PROC_SDMMC1_CK  (2 unrouted)
PROC_SDMMC1_CMD  (2 unrouted)
PROC_SDMMC1_D0  (2 unrouted)
PROC_SDMMC1_D1  (2 unrouted)
PROC_SDMMC1_D2  (2 unrouted)
PROC_SDMMC1_D3  (2 unrouted)
PROC_SDMMC1_D4  (2 unrouted)
PROC_SDMMC1_D5  (2 unrouted)
PROC_SDMMC1_D6  (2 unrouted)
PROC_SDMMC1_D7  (2 unrouted)
PROC_USB_OTG_HS_ULPI_CK  (1 unrouted)
PROC_USB_OTG_HS_ULPI_D0  (1 unrouted)
PROC_USB_OTG_HS_ULPI_D1  (1 unrouted)
PROC_USB_OTG_HS_ULPI_D2  (1 unrouted)
PROC_USB_OTG_HS_ULPI_D3  (1 unrouted)
PROC_USB_OTG_HS_ULPI_D4  (1 unrouted)
PROC_USB_OTG_HS_ULPI_D5  (1 unrouted)
PROC_USB_OTG_HS_ULPI_D6  (1 unrouted)
PROC_USB_OTG_HS_ULPI_D7  (1 unrouted)
PROC_USB_OTG_HS_ULPI_DIR  (1 unrouted)
PROC_USB_OTG_HS_ULPI_NXT  (1 unrouted)
PROC_USB_OTG_HS_ULPI_STP  (1 unrouted)
VCC_S1_6V7  (7 unrouted)
VCC_TIER1_1V8  (99 unrouted)
VCC_TIER1_3V3  (23 unrouted)